# Altium PCB 数字电路时钟.PcbDoc
Units mil, origin at the board's own origin, x right, y up, seen from the top; angles counter-clockwise.
Board outline 4060 x 3660 mil, 2 copper layers (Top Layer, Bottom Layer); 50 components, 110 nets, 472 pads, 60 vias.
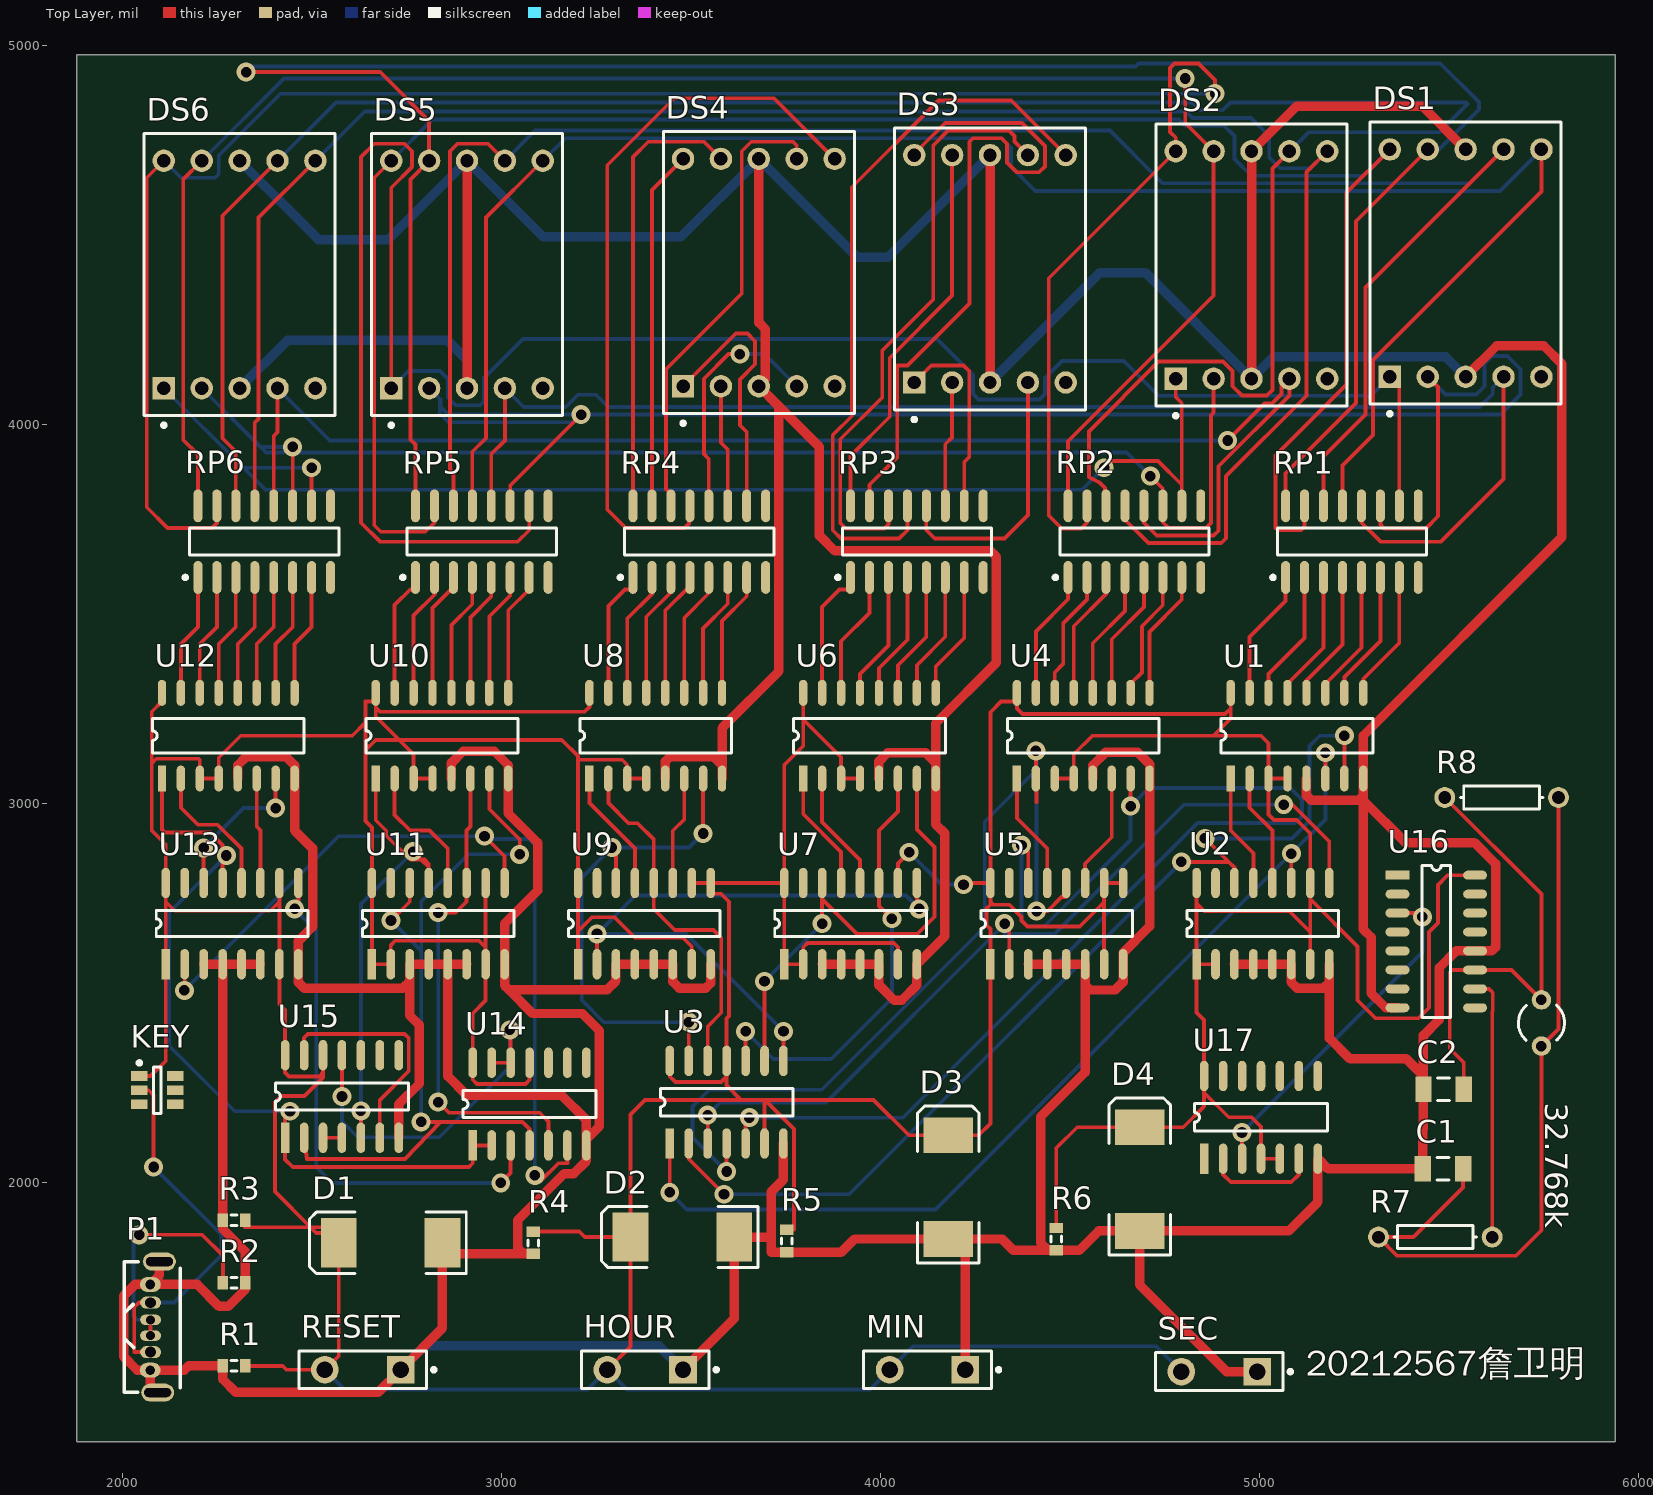
[diagram p0: Top Layer view]
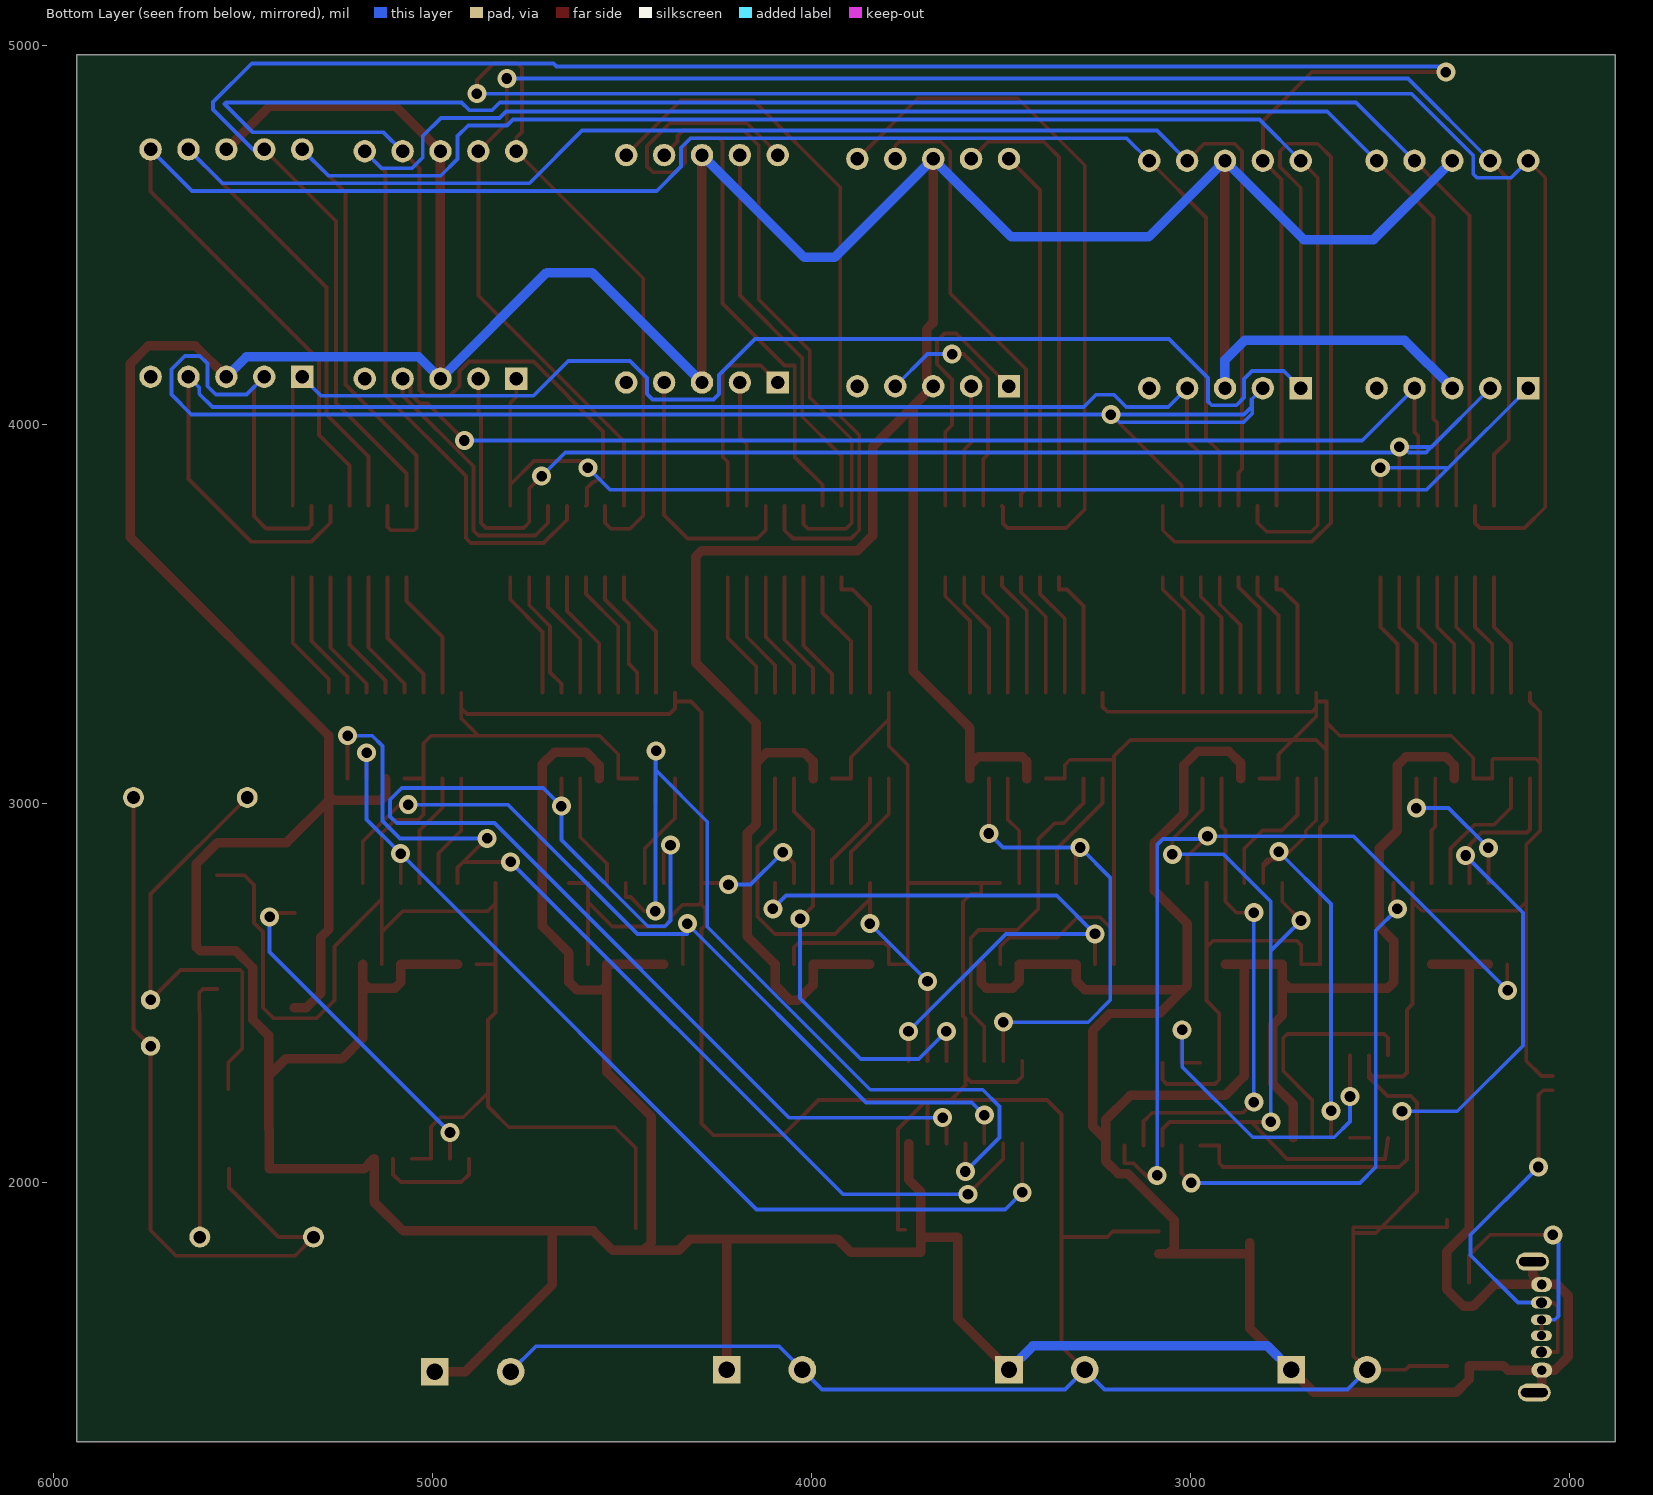
[diagram p1: Bottom Layer view, seen from below]

## Layer stack, top to bottom
Top Solder: solder mask 0.4, Solder Resist, Dk 3.5
Top Layer: signal copper 1.4
Dielectric 1: dielectric 12.6, FR-4, Dk 4.8
Bottom Layer: signal copper 1.4
Bottom Solder: solder mask 0.4, Solder Resist, Dk 3.5

## Board outline
1880,1315 1880,4975 5940,4975 5940,1315

## Design rules (kind name [scope] priority, off if disabled: settings)
Clearance [All] p1: gap=10 ignorepadtopadclearanceinfootprint=FALSE except(0: Arc-Hole Track-Hole SMDPad-Hole THPad-Hole Via-Hole Fill-Hole Poly-Hole Region-Hole Text-Hole)
MinimumSolderMaskSliver [All] p1: minsoldermaskwidth=2
PolygonConnect [All] p1: connectstyle=Relief reliefconductorwidth=10 reliefentries=4 polygonreliefangle="90 Angle" airgapwidth=10
RoutingVias [All] p1: holewidth=28 width=50 viastyle="Through Hole" minholewidth=28 minwidth=50 maxholewidth=28 maxwidth=50
SilkToSilkClearance [All] p1: silktosilkclearance=5
SilkToSolderMaskClearance [IsPad] p1: minsilkscreentomaskgap=0 clearancetoexposedcopper=TRUE
SolderMaskExpansion [All] p1: expansion=4 istentingtop=FALSE
Width GND [InNet('GND')] p1: maxlimit=35 minlimit=20 preferedwidth=25
Width [All] p2: maxlimit=10 minlimit=10 preferedwidth=10
27 further rules are at their usual default settings.

## Components (designator, comment, footprint, x,y, rotation, side; value= is the part's Value field where it differs from the comment)
32.768k "XTAL" R38 5745,2420 r180 top
C1 "Cap Semi" C1206 5485,2035 r0 top value=18p
C2 "Cap Semi" C1206 5486.85,2245 r0 top value=18p
D1 "Diode" SMC 2708.19,1840 r180 top
D2 "Diode" SMC 3478.41,1855 r180 top
D3 "Diode" SMC 4180,1986.81 r90 top
D4 "Diode" SMC 4685,2008.19 r90 top
DS1 "Dpy Blue-CC" H 5545,4425 r0 top
DS2 "Dpy Blue-CC" H 4980,4420 r0 top
DS3 "Dpy Blue-CC" H 4290,4410 r0 top
DS4 "Dpy Blue-CC" H 3680,4400 r0 top
DS5 "Dpy Blue-CC" H 2910,4395 r0 top
DS6 "Dpy Blue-CC" H 2310,4395 r0 top
HOUR "SW-PB" SPST-2 3380,1505 r180 top
KEY "SW-DPDT" SOT23-6_N 2092.76,2242.6 r0 top
MIN "SW-PB" SPST-2 4125,1505 r180 top
P1 "type-c-6p" "type-c-6p - duplicate" 2098.38,1447.04 r90 top
R1 "Res3" J1-0603 2295,1515 r0 top value=1K
R2 "Res3" J1-0603 2295.47,1735 r180 top value=1K
R3 "Res3" J1-0603 2295,1900 r0 top value=1K
R4 "Res3" J1-0603 3085,1840 r90 top value=1K
R5 "Res3" J1-0603 3753.4,1845 r90 top value=1K
R6 "Res3" J1-0603 4465,1849.53 r90 top value=1K
R7 "Res1" AXIAL-0.3 5465,1855 r180 top value=130K
R8 "Res1" AXIAL-0.3 5640,3015 r180 top value=10M
RESET "SW-PB" SPST-2 2635,1505 r180 top
RP1 "Res Pack3" SO-16_N 5245,3690 r90 top value=510
RP2 "Res Pack3" SO-16_N 4671,3690 r90 top value=510
RP3 "Res Pack3" SO-16_N 4097,3690 r90 top value=510
RP4 "Res Pack3" SO-16_N 3523,3690 r90 top value=510
RP5 "Res Pack3" SO-16_N 2949,3690 r90 top value=510
RP6 "Res Pack3" SO-16_N 2375,3690 r90 top value=510
SEC "SW-PB" SPST-2 4895,1500 r180 top
U1 "CD4511" CD4511BM/TR 4925,3065 r90 top
U2 "74LS161AD" 74LS161 4835,2575 r90 top
U3 "74LS00" 74LS00 3445,2101.97 r90 top
U4 "CD4511" CD4511BM/TR 4361,3065 r90 top
U5 "74LS161AD" 74LS161 4291,2575 r90 top
U6 "CD4511" CD4511BM/TR 3797,3065 r90 top
U7 "74LS161AD" 74LS161 3747,2575 r90 top
U8 "CD4511" CD4511BM/TR 3233,3065 r90 top
U9 "74LS161AD" 74LS161 3203,2575 r90 top
U10 "CD4511" CD4511BM/TR 2669,3065 r90 top
U11 "74LS161AD" 74LS161 2659,2575 r90 top
U12 "CD4511" CD4511BM/TR 2105,3065 r90 top
U13 "74LS161AD" 74LS161 2115,2575 r90 top
U14 "74LS00" 74LS00 2925,2096.97 r90 top
U15 "74LS08" 74LS08 2430,2116.97 r90 top
U16 "CD4060BM/TR" CD4060BM/TR 5365.28,2810 r0 top
U17 "74LS74" 74LS74 4855,2061.97 r90 top

## Footprints (in the part's own frame and the unit in brackets; to place one, negate y for a bottom-side part, rotate by r counter-clockwise, add the part's x,y. Pads: shape width x height; smd on the part's side, far side on the other; paste and mask are expansions set on the pad)
74LS00 [mil]
  rect 80.24x22.6 smd: 1(0,0)
  oval 80.24x22.6 smd: 2(0,-50) 3(0,-100) 4(0,-150) 5(0,-200) 6(0,-250) 7(0,-300) 8(218.03,-300) 9(218.03,-250) 10(218.03,-200) 11(218.03,-150) 12(218.03,-100) 13(218.03,-50) 14(218.03,0)
  silkscreen extent 73,-325 145,25
74LS08 [mil]
  rect 80.24x22.6 smd: 1(0,0)
  oval 80.24x22.6 smd: 2(0,-50) 3(0,-100) 4(0,-150) 5(0,-200) 6(0,-250) 7(0,-300) 8(218.03,-300) 9(218.03,-250) 10(218.03,-200) 11(218.03,-150) 12(218.03,-100) 13(218.03,-50) 14(218.03,0)
  silkscreen extent 73,-325 145,25
74LS74 [mil]
  rect 80.24x22.6 smd: 1(0,0)
  oval 80.24x22.6 smd: 2(0,-50) 3(0,-100) 4(0,-150) 5(0,-200) 6(0,-250) 7(0,-300) 8(218.03,-300) 9(218.03,-250) 10(218.03,-200) 11(218.03,-150) 12(218.03,-100) 13(218.03,-50) 14(218.03,0)
  silkscreen extent 73,-325 145,25
74LS161 [mil]
  rect 80.24x22.6 smd: 1(0,0)
  oval 80.24x22.6 smd: 2(0,-50) 3(0,-100) 4(0,-150) 5(0,-200) 6(0,-250) 7(0,-300) 8(0,-350) 9(214.33,-350) 10(214.33,-300) 11(214.33,-250) 12(214.33,-200) 13(214.33,-150) 14(214.33,-100) 15(214.33,-50) 16(214.33,0)
  silkscreen extent 73,-375 141,25
AXIAL-0.3 [mm] "Axial Device, Thru-Hole; 2 Leads; 0.3 in Pin Spacing"
  round 1.4 hole 0.85: 1(-3.81,0) 2(3.81,0)
  silkscreen extent -2.77,-0.76 2.77,0.76
C1206 [mm] "Chip Capacitor, Body 3.2x1.6mm, IPC High Density"
  rect 1.1x1.7 smd: 1(-1.35,0) 2(1.35,0)
  silkscreen extent -0.4,-0.75 0.4,0.75, body extent -1.7,-0.9 1.7,0.9, height 1.3
CD4060BM/TR [mm]
  rect 1.6x0.6 smd: 1(0,0)
  oval 1.6x0.6 smd: 2(0,-1.27) 3(0,-2.54) 4(0,-3.81) 5(0,-5.08) 6(0,-6.35) 7(0,-7.62) 8(0,-8.89) 9(5.2,-8.89) 10(5.2,-7.62) 11(5.2,-6.35) 12(5.2,-5.08) 13(5.2,-3.81) 14(5.2,-2.54) 15(5.2,-1.27) 16(5.2,0)
  silkscreen extent 1.64,-9.53 3.57,0.64
CD4511BM/TR [mm]
  rect 1.745x0.56 smd: 1(0,0)
  oval 1.745x0.56 smd: 2(0,-1.27) 3(0,-2.54) 4(0,-3.81) 5(0,-5.08) 6(0,-6.35) 7(0,-7.62) 8(0,-8.89) 9(5.745,-8.89) 10(5.745,-7.62) 11(5.745,-6.35) 12(5.745,-5.08) 13(5.745,-3.81) 14(5.745,-2.54) 15(5.745,-1.27) 16(5.745,0)
  silkscreen extent 1.71,-9.53 4.04,0.64
H [mm] "LED, 7-Segment Display, 14.2 mm, RHD; 10 Leads; Row Space 15.24 mm; Pitch 2.54 mm"
  rect 1.5x1.5 hole 0.9: 1(-5.08,-7.62)
  round 1.5 hole 0.9: 2(-2.54,-7.62) 3(0,-7.62) 4(2.54,-7.62) 5(5.08,-7.62) 6(5.08,7.62) 7(2.54,7.62) 8(0,7.62) 9(-2.54,7.62) 10(-5.08,7.62)
  silkscreen extent -6.4,-10.22 6.4,9.45, body extent -6.4,-9.45 6.4,9.45, height 8.25
J1-0603 [mm] "Chip Resistor, Body 1.6x0.8mm, IPC High Density"
  rect 0.7x0.9 smd: 1(-0.75,0) 2(0.75,0)
  silkscreen extent -0.2,-0.35 0.2,0.35, body extent -0.85,-0.48 0.85,0.48, height 0.9
R38 [mm] "Crystal, Thru-Hole; 2 Leads; Body 3.1 x 8.2 mm (Dia.xH)"
  round 1.3 hole 0.7: 1(0,1.55) 2(0,-1.55)
  silkscreen extent -1.55,-1.19 1.55,1.17
SMC [mm] "DO-214-AB/SMC; 2 C-Bend Leads; Body 7.9 x 5.9 mm, inc. leads (LxW)"
  rect 2.4x3.3 smd: 1(-3.475,0) 2(3.475,0)
  silkscreen extent -5.07,-2.05 5.43,2.06
SO-16_N [mm] "SOIC, 16-Leads, Body 9.9x3.9mm, Pitch 1.27mm, IPC Medium Density"
  oval 2.2x0.6 smd: 1(-2.4,4.445) 2(-2.4,3.175) 3(-2.4,1.905) 4(-2.4,0.635) 5(-2.4,-0.635) 6(-2.4,-1.905) 7(-2.4,-3.175) 8(-2.4,-4.445) 9(2.4,-4.445) 10(2.4,-3.175) 11(2.4,-1.905) 12(2.4,-0.635) 13(2.4,0.635) 14(2.4,1.905) 15(2.4,3.175) 16(2.4,4.445)
  silkscreen extent -2.52,-5 0.9,5.42, body extent -2,-5 2,5, height 1.75
SOT23-6_N [mm] "SOT23, 6-Leads, Body 2.9x1.6mm, Pitch 0.95mm, Lead Span 2.7mm, IPC Medium Density"
  rect 1.1x0.65 smd: 1(-1.2,0.95) 2(-1.2,0) 3(-1.2,-0.95) 4(1.2,-0.95) 5(1.2,0) 6(1.2,0.95)
  silkscreen extent -1.32,-1.55 0.25,1.95, body extent -0.9,-1.55 0.9,1.55, height 1.45
SPST-2 [mm] "Switch; 2 Leads"
  rect 1.85x1.85 hole 1.1: 1(-2.54,0)
  round 1.85 hole 1.1: 2(2.54,0)
  silkscreen extent -4.89,-1.27 4.28,1.27
"type-c-6p - duplicate" [mm]
  oval 1.2x2.2 hole 1.8 slot 0.6 at 0 deg: 1(-0.056,0.118) 2(8.719,0.001)
  oval 0.7x1.4 hole 0.6: A5(3.758,0.594) B5(4.818,0.594)
  oval 0.8x1.4 hole 0.72: A9(5.97,0.594) B9(2.655,0.594)
  oval 1x1.4 hole 0.65: A12(7.187,0.607) B12(1.442,0.62)
  silkscreen extent -0.03,-1.39 8.7,2.35

## Part data
32.768k: "Crystal Oscillator", LatestRevisionDate=17-Jul-2002, LatestRevisionNote="Re-released for DXP Platform.", PackageDescription="Crystal, Thru-Hole; 2 Leads; Body 3.1 x 8.2 mm (Dia.xH)", PackageReference=R38, Published=8-Jun-2000, Publisher="Altium Limited"
C1 C2: "Capacitor (Semiconductor SIM Model)", LatestRevisionDate=29-May-2009, LatestRevisionNote="IPC-7351 Footprint Added.", PackageDescription="Chip Capacitor", PackageReference=C1206, Published=8-Jun-2000, Publisher="Altium Limited"
D1 D2 D3 D4: "Default Diode", Code_JEDEC=DO-214-AB, LatestRevisionDate=17-Jul-2002, LatestRevisionNote="Re-released for DXP Platform.", PackageDescription="DO-214-AB/SMC; 2 C-Bend Leads; Body 7.9 x 5.9 mm, inc. leads (LxW)", PackageReference=SMC, PackageVersion=Sep-1996, Published=8-Jun-2000, Publisher="Altium Limited"
DS1 DS2 DS3 DS4 DS5 DS6: "14.2 mm General Purpose Blue 7-Segment Display: CC, RH DP, Gray Surface", Colour=Blue, ComponentLink1Description="Manufacturer Link", ComponentLink1URL=http://www.agilent.com/, DatasheetVersion=24-Sep-2002, LatestRevisionDate=17-Dec-2003, LatestRevisionNote="Schematic revised, PCB Footprint replaced.", MinimumIntensity="2020 ucd", Note="IF = 10 mA", PackageDescription="LED, 7-Segment Display, 14.2 mm, RHD; 10 Leads; Row Space 15.24 mm; Pitch 2.54 mm", PackageReference=H, PackageVersion=24-Sep-2002, Published=8-Jun-2000, Publisher="Altium Limited"
HOUR MIN RESET SEC: "Switch", LatestRevisionDate=17-Jul-2002, LatestRevisionNote="Re-released for DXP Platform.", PackageDescription="Switch; 2 Leads", PackageReference=SPST-2, Published=24-Mar-1999, Publisher="Altium Limited"
KEY: "Double-Pole, Double-Throw Switch", LatestRevisionDate=17-Jul-2002, LatestRevisionNote="Re-released for DXP Platform.", PackageDescription="Switch; 6 Leads", PackageReference=DPDT-6, Published=24-Mar-1999, Publisher="Altium Limited"
R1 R2 R3 R4 R5 R6 R7 R8: "Resistor", Published=8-Jun-2000, Publisher="Altium Limited"
  R1 R2 R3 R4 R5 R6: LatestRevisionDate=29-May-2009, LatestRevisionNote="IPC-7351 Footprint Added.", PackageDescription="Chip Resistor", PackageReference=J1-0603
  R7 R8: LatestRevisionDate=17-Jul-2002, LatestRevisionNote="Re-released for DXP Platform.", PackageDescription="Axial Device, Thru-Hole; 2 Leads; 0.3 in Pin Spacing", PackageReference=AXIAL-0.3
RP1 RP2 RP3 RP4 RP5 RP6: "Isolated Resistor Network", Code_IPC=SOIC127P600-16, Code_JEDEC=MS-012-AC, LatestRevisionDate=29-May-2009, LatestRevisionNote="IPC-7351 Footprint Added.", PackageDescription="16-Pin Small Outline Integrated Circuit 1.27 mm Pitch", PackageReference=SO-16, Published=24-Mar-1999, Publisher="Altium Limited"

## Via types
v1: diameter 50, hole 28, Top Layer to Bottom Layer, 60 vias

## Nets (pads, with @x,y where several pads share a name; then routed paths per layer and width w, separated by ;. In a path a pad name is that pad's centre, name@x,y a point inside that pad or via, vN(x,y) a via of type N, cw(c..) or ccw(c..) an arc to the next point about the centre after c; other vN are vias at no path point)
CLR: D1.2 D2.2 D3.2 D4.2 HOUR.2 KEY.1 MIN.2 R1.2 R3.2 R4.2 R5.2 R6.2 RESET.2 SEC.2 U1.3 U1.4 U1.16 U2.1 U2.2 U2.7 U2.10 U2.16 U3.6 U3.11 U3.14 U4.3 U4.4 U4.16 U5.1 U5.7 U5.9 U5.10 U5.16 U6.3 U6.4 U6.16 U7.1 U7.2 U7.7 U7.10 U7.16 U8.3 U8.4 U8.16 U9.1 U9.7 U9.9 U9.10 U9.16 U10.3 U10.4 U10.16 U11.1 U11.2 U11.7 U11.10 U11.16 U12.3 U12.4 U12.16 U13.1 U13.7 U13.10 U13.16 U14.11 U14.14 U15.12 U15.14 U16.16 U17.4 U17.5 U17.14 | length 23312.6
  Top Layer w10: KEY.1 2075,2280 2115,2320 U13.1 2115,2740 ; U12.16 2105,3268 2078,3241 2078,3105 ; R1.2 2424,1515 2434,1505 RESET.2 2571.38,1541.38 D1.2 D1.2@2571.38,1866 ; R3.2 2324.53,1881 2497,1881 ; U13.10 2415,2740 ; U15.12 2530,2289 ; U10.16 U10.16@2669,3268 ; U10.4 U10.3 2769,3129 2731,3167 ; U11.10 2959,2620 ; U14.11 3075,2270 3064,2259 2936,2259 2925,2270 U14.14 2925,2445 2959,2479 U11.7 2959,2620 ; R4.2 3206,1869.53 3220.53,1855 D2.2 ; U9.1 3203,2662 ; U8.16 3233,3254 3220,3241 2680,3241 2669,3252 ; HOUR.2 3341.6,1566.6 D2.2 ; U8.4 U8.3 3333,3101 3319.65,3114.35 3206,3114.35 3203,3111.35 ; U3.14 3445,2279 3460,2264 3580,2264 3595,2279 ; U9.7 3503,2622 3480,2645 3353,2645 3299,2699 3240,2699 3203,2662 ; U9.10 U9.9 ; U3.6 3695,2217.09 ; R5.2 3773,1874.53 3773,2140 3695.91,2217.09 ; U6.16 3797,3221 ; U6.4 U6.3 3897,3121 3797,3221 ; U7.7 4047,2620 4036,2631 3808,2631 3797,2620 U7.2 U7.1 U7.16 ; U7.10 4047,2841 v1(4076.5,2870.5) ; v1(4220,2785) 4224.33,2789.33 U5.16 ; U4.16 U4.16@4361,3268 ; U4.3 U4.4 4511,3129 4560,3178 4880,3178 ; R6.2 4465,2090 4520,2145 D4.2 4800,2145 4855,2200 4855,2236 ; U5.7 4591,2738.63 ; U5.9 U5.10 4591,2738.63 ; U2.16 4835,2736 ; U2.2 U2.1 ; U1.16 4925,3250 ; U17.5 U17.4 5005,2146 4980,2171 4920,2171 4855,2236 ; U1.4 U1.3 ; U2.7 5135,2660 ; U16.16 5498,2810 5471.77,2783.77 5471.77,2683.77 5448,2660 5448,2460 5420.5,2432.5 5307.5,2432.5 5260,2480 5260,2622 5135,2747 ; 2078,3105 2078,2928 2115,2891 U13.16 2115,2740 ; 2078,3105 2090,3117 2202,3117 2205,3114 U12.3 U12.4 2255,3120 2313,3178 2607,3178 2642,3213 ; 2115,2740 2139,2716 2391,2716 2415,2740 ; 2415,2740 U13.7 2415,2470 2430,2455 U15.14 2430,2289 2440,2279 2520,2279 2530,2289 ; 2497,1881 2512,1866 D1.2@2571.38,1866 ; 2497,1881 2403,1975 2403,2210.19 2420,2227.19 2481.19,2227.19 2530,2276 2530,2289 ; 2497,1881 2571.38,1881 D1.2@2571.38,1866 ; 2642,3140 2642,3213 ; 2642,3140 2642,2953 2659,2936 U11.16 U11.1 U11.2 2709,2626 2720,2637 2942,2637 2959,2620 ; 2642,3140 2669,3167 2731,3167 ; 2642,3213 2642,3268 U10.16@2669,3268 ; 2669,3252 2669,3229 2731,3167 ; 2669,3252 U10.16@2669,3268 ; 2731,3167 3160,3167 3203,3124 3203,3111.35 ; 3203,2662 U9.16 3203,3111.35 ; D2.2 3341.6,2178.68 3380,2217.09 3633.14,2217.09 ; U9.9 3553,2761 3580,2761 3601,2740 3601,2438 3595,2432 U3.11 3595,2279 ; U9.9 U7.16 ; 3595,2279 3595,2256 3633.14,2217.09 ; 3633.14,2217.09 3695,2217.09 ; 3695,2217.09 3695.91,2217.09 ; 3695.91,2217.09 3982.91,2217.09 4076.38,2123.62 D3.2 4260,2123.62 4291,2154.62 U5.1 4291,2668 4281,2678 4281,2722 4291,2732 4291,2740 ; U7.16 3747,3101 3797,3151 3797,3221 ; 4291,2740 U5.16 ; 4291,2740 4299,2732 4341,2732 4373,2700 4373,2690 4388.79,2674.21 4526.58,2674.21 4591,2738.63 ; U5.16 4291,3240 4319,3268 U4.16@4361,3268 ; U4.16@4361,3268 4361,3250 4376,3235 4910,3235 4925,3250 ; U2.1 4835,2736 ; U2.1 4835,2448 4855,2428 U17.14 4855,2236 ; 4835,2736 4856,2715 5080,2715 5135,2660 ; 4880,3178 5005,3178 5025,3158 U1.3 ; 4880,3178 4925,3223 4925,3250 ; U1.3 5025,2970 5039.35,2955.65 5099.35,2955.65 5135,2920 U2.10 5135,2747 ; 5135,2660 5135,2747
  Bottom Layer w10: RESET.2 2587,1453 3228,1453 HOUR.2 3332,1453 3973,1453 MIN.2 4087,1567 4728,1567 SEC.2 ; v1(4076.5,2870.5) 4162,2785 v1(4220,2785)
DS11: DS1.7 DS5.7 RP1.14 RP5.14 | length 5011.1
  Top Layer w10: RP5.14 2874,3872 2865,3881 2865,4720 2885,4740 2965,4740 DS5.7 ; RP1.14 5170,3915 5280.47,4025.47 5280.47,4360.47 DS1.7
  Bottom Layer w10: DS5.7 3089.53,4774.53 4606.47,4774.53 4745.53,4635.47 5555.47,4635.47 DS1.7
DS12: DS1.6 DS5.6 RP1.13 RP5.13 | length 4937.2
  Top Layer w10: RP5.13 2924,3927 2960,3963 2960,4545 DS5.6 ; RP1.13 5220,3891 5300.47,3971.47 5300.47,4169.53 5745,4614.06 DS1.6
  Bottom Layer w10: DS5.6 3169.53,4754.53 4320,4754.53 4345,4729.53 4345,4680 4409.53,4615.47 5635.47,4615.47 DS1.6
DS13: DS1.4 DS5.4 RP1.12 RP5.12 | length 3828.5
  Top Layer w10: RP5.12 2974,3921 3010,3957 DS5.4 ; RP1.12 5270,3740 5320,3690 5480,3690 5645,3855 DS1.4
  Bottom Layer w10: DS5.4 3059.53,4045.47 3170.74,4045.47 3202.68,4077.41 3250.74,4077.41 3282.68,4045.47 5581.86,4045.47 5616.39,4080 5616.39,4096.39 DS1.4
DS14: DS1.2 DS5.2 RP1.11 RP5.11 | length 4711.7
  Top Layer w10: RP5.11 3024,3838 v1(3211,4025) ; RP1.11 5320,3735 5330,3725 5440,3725 5472,3757 5472,4098 DS1.2
  Bottom Layer w10: DS5.2 2837.91,4067.09 ; v1(3211,4025) 3207.63,4025 3187.63,4005 2860.91,4005 2837.91,4028 2837.91,4045 2837.91,4067.09 ; DS1.2 5492,4078 5573,4078 5595,4100 5595,4160 5615,4180 5655,4180 5690,4145 5690,4078 5637.47,4025.47 3211,4025.47 2859.53,4025.47 2840,4045 2840,4065 2837.91,4067.09
DS15: DS1.1 DS5.1 RP1.10 RP5.10 | length 5712.3
  Top Layer w10: DS5.1 2710,4624 2765,4679 2765,4720 2745,4740 2665,4740 2630,4705 2630,3740 2680,3690 3044,3690 3074,3720 RP5.10 ; DS1.1 5370,4100 RP1.10
  Bottom Layer w10: DS5.1 2755,4140 2839,4140 2860,4119 2860,4070 2880,4050 2945,4050 2955,4060 2955,4122 3058,4225 4150,4225 4245,4130 4245,4080 4259.53,4065.47 4420.47,4065.47 4435,4080 4435,4122 4480,4167 4643,4167 4735,4075 5295,4075 DS1.1
DS16: DS1.9 DS5.9 RP1.16 RP5.16 | length 6176.7
  Top Layer w10: v1(2327,4929) 2681,4929 2810,4800 DS5.9 2761,4646 2761,3959 2774,3946 RP5.16 ; RP1.16 5070,3869.92 5255.55,4055.47 5255.55,4535.55 DS1.9
  Bottom Layer w10: v1(2327,4929) 2342,4944 4674,4944 4682,4952 5478,4952 5580,4850 5580,4830 5475,4725 DS1.9
DS17: DS1.10 DS5.10 RP1.15 RP5.15 | length 5269.4
  Top Layer w10: DS5.10 2665,4650 2665,3733.28 2682.28,3716 2800,3716 2824,3740 RP5.15 ; RP1.15 5120,3729 5111,3720 5049,3720 5043,3726 5043,3917 5231,4105 5231,4611 DS1.10
  Bottom Layer w10: DS5.10 2819,4804 4788.47,4804 4804.28,4788.18 4906.82,4788.18 4935,4760 4935,4700 4979.53,4655.47 5275.47,4655.47 DS1.10
DS21: DS2.7 DS6.7 RP2.14 RP6.14 | length 6225.5
  Top Layer w10: RP6.14 2300,3928 2265,3963 2265,4550 DS6.7 ; RP2.14 4593.55,3786.94 4593.55,3831.45 4580.15,3844.85 4579,3846 4577.55,3846.73 4551,3860 4551,3981 4735,4165 4905,4165 4930,4140 4930,4100 4954.53,4075.47 5020,4075.47 5035,4090.47 5035,4675 DS2.7
  Bottom Layer w10: DS6.7 2564,4849 4823.47,4849 4844.28,4828.18 4903.47,4828.18 4924.28,4849 5546,4849 5550,4845 5475,4770 5130,4770 DS2.7
DS22: DS2.6 DS6.6 RP2.13 RP6.13 | length 5280
  Top Layer w10: RP6.13 2350,4004 2360,4014 2360,4545 DS6.6 ; RP2.13 4646,3748 4707.82,3686.18 4900,3686.18 4912.81,3698.99 4912.81,3862.81 5125,4075 5125,4665 DS2.6
  Bottom Layer w10: DS6.6 2640,4825 4807.47,4825 4824.28,4808.18 4978.82,4808.18 5027,4760 5027,4703.47 5055,4675.47 5135.47,4675.47 DS2.6
DS23: DS2.4 DS6.4 RP2.12 RP6.12 | length 3859.9
  Top Layer w10: RP6.12 2400,3969.2 2410,3979.2 DS6.4 ; RP2.12 4696,3740 4729.82,3706.18 4880,3706.18 4892.81,3718.99 4892.81,3888.8 5080,4075.98 DS2.4 5059.49,4099.49 5059.49,4080 5034.96,4055.47 5015.47,4055.47 v1(4917,3957)
  Bottom Layer w10: DS6.4 2548,3957 v1(4917,3957)
DS24: DS2.2 DS6.2 RP2.11 RP6.11 | length 3501.5
  Top Layer w10: RP6.11 v1(2450,3940) ; v1(4713,3863) 4746,3830 RP2.11 4746,3741 4760.82,3726.18 4860,3726.18 4872.81,3738.99 4872.81,4022.81 4880,4030 DS2.2
  Bottom Layer w10: DS6.2 2365,3940 2370,3940 ; v1(2450,3940) 2370,3940 ; v1(4713,3863) 4651,3925 2450,3925 2442.65,3932.35 2431.52,3932.35 2424.18,3925 2380,3925 2370,3935 2370,3940
DS25: DS2.1 DS6.1 RP2.10 RP6.10 | length 3477.2
  Top Layer w10: RP6.10 v1(2500,3885) ; v1(4591,3885) 4609,3903 4733,3903 4796,3840 ; DS2.1 4780,4071.47 4796,4055.47 4796,3840 ; RP2.10 4796,3840
  Bottom Layer w10: DS6.1 2320,3885 ; v1(2500,3885) 2320,3885 ; v1(4591,3885) 4533,3827 2378,3827 2320,3885
DS26: DS2.9 DS6.9 RP2.16 RP6.16 | length 4949.5
  Top Layer w10: RP6.16 2200,3920 2161,3959 2161,4646 DS6.9 ; RP2.16 4496,3955 4880,4339 DS2.9 4805,4795 v1(4805,4912)
  Bottom Layer w10: DS6.9 2427,4912 v1(4805,4912)
DS27: DS2.10 DS6.10 RP2.15 RP6.15 | length 5775.4
  Top Layer w10: DS6.10 2065,4650 2065,3781 2120,3726 2237,3726 2250,3739 RP6.15 ; RP2.15 4546,3740 4530,3724 4480,3724 4445,3759 4445,4385 DS2.10 4780,4756 4765,4771 4765,4940 4777,4952 4840,4952 4884,4908 v1(4884,4872)
  Bottom Layer w10: DS6.10 2155,4650 2245,4650 2255,4660 2255,4709 2418,4872 v1(4884,4872)
DS31: DS3.7 RP3.14 | length 1585.8
  Top Layer w10: RP3.14 4022,3736 4010,3724 3910,3724 3895,3739 3895,3960 4005.47,4070.47 4005.47,4194.53 4140,4329.06 4140,4735 4179.53,4774.53 4340,4774.53 4354.53,4760 4354.53,4745.47 DS3.7
DS32: DS3.6 RP3.13 | length 1924.9
  Top Layer w10: RP3.13 4072,3720 4050,3698 3897,3698 3875,3720 3875,3971 3925,4021 3925,4625 4154,4854 4346,4854 DS3.6
DS33: DS3.4 RP3.12 | length 717.3
  Top Layer w10: RP3.12 4122,3720 4144,3698 4328,3698 4390,3760 DS3.4
DS34: DS3.2 RP3.11 | length 333
  Top Layer w10: RP3.11 4172,3947 4190,3965 DS3.2
DS35: DS3.1 RP3.10 | length 530.7
  Top Layer w10: DS3.1 4135,4155 4220,4155 4235,4140 4235,3913 4222,3900 RP3.10
DS36: DS3.9 RP3.16 | length 1036.5
  Top Layer w10: RP3.16 3922,3916 4025.47,4019.47 4025.47,4174.76 4190,4339.29 DS3.9
DS37: DS3.10 RP3.15 | length 1822.2
  Top Layer w10: RP3.15 3972,3840 4045.47,3913.47 4045.47,4154.53 4072.16,4154.53 4236,4318.37 4236,4745.06 4245.47,4754.53 4320,4754.53 4334.53,4740 4334.53,4690.47 4360,4665 4420,4665 4435,4680 4435,4734 4374,4795 4171.71,4795 4110,4733.29 4110,4730 DS3.10
DS41: DS4.7 RP4.14 | length 1218.2
  Top Layer w10: RP4.14 3448,3816 3435,3829 3435,4145 3635,4345 3635,4720 3660,4745 3770,4745 3780,4735 DS4.7
DS42: DS4.6 RP4.13 | length 1936.3
  Top Layer w10: RP4.13 3495.54,3782.03 3495.54,3737.54 3484,3726 3329,3726 3280,3775 3280,4683.24 3456.76,4860 3720,4860 DS4.6
DS43: DS4.4 RP4.12 | length 648
  Top Layer w10: RP4.12 3548,3908 3535,3921 3535,4120 3600,4185 v1(3630,4185)
  Bottom Layer w10: v1(3630,4185) 3695,4185 DS4.4
DS44: DS4.2 RP4.11 | length 323
  Top Layer w10: DS4.2 3580,3951 3598,3933 RP4.11
DS45: DS4.1 RP4.10 | length 714.4
  Top Layer w10: DS4.1 3619,4239 3650,4239 3670,4219 3670,4158 3630,4118 3630,3997 3648,3979 RP4.10
DS46: DS4.9 RP4.16 | length 1187.7
  Top Layer w10: RP4.16 3348,4705 3388,4745 3535,4745 DS4.9
DS47: DS4.10 RP4.15 | length 949.5
  Top Layer w10: RP4.15 3398,4618 DS4.10
GND: C1.1 C2.1 D1.1 D2.1 D3.1 D4.1 DS1.3 DS1.8 DS2.3 DS2.8 DS3.3 DS3.8 DS4.3 DS4.8 DS5.3 DS5.8 DS6.3 DS6.8 HOUR.1 MIN.1 P1.1 P1.2 P1.A12 P1.B12 R1.1 R2.1 R3.1 R4.1 R5.1 R6.1 RESET.1 SEC.1 U1.5 U1.8 U2.3 U2.4 U2.5 U2.6 U2.8 U3.7 U4.5 U4.8 U5.3 U5.4 U5.5 U5.6 U5.8 U6.5 U6.8 U7.3 U7.4 U7.5 U7.6 U7.8 U8.5 U8.8 U9.3 U9.4 U9.5 U9.6 U9.8 U10.5 U10.8 U11.3 U11.4 U11.5 U11.6 U11.8 U12.5 U12.8 U13.3 U13.4 U13.5 U13.6 U13.8 U14.7 U15.7 U16.8 U16.12 U17.7 | length 31074.9
  Top Layer w25: P1.1 2073.97,1464.59 P1.B12 ; P1.2 2098.35,1753.87 P1.A12 ; U13.3 U13.4 ; U12.5 2305,3100 2327,3122 2433,3122 2455,3100 U12.8 2455,2928 2502.5,2880.5 2502.5,2674 2465,2636.5 U13.8 2465,2527 2480,2512 2741,2512 2759,2530 ; U13.6 U13.5 U13.4 ; U15.7 2730,2206 2783.8,2259.8 2783.8,2415 2759,2439.8 2759,2530 ; D1.1 D1.1@2845,1810.47 ; U10.5 2869,3106 2900,3137 2982,3137 3019,3100 U10.8 3019,2973 3096.5,2895.5 3096.5,2769.5 3009,2682 U11.8 3009,2519 3020,2508 ; U11.6 U11.5 ; DS5.3 DS5.8 ; R4.1 3060,1810.47 ; U8.5 3433,3110 3445,3122 3561,3122 3583,3100 ; HOUR.1 3615.22,1640.22 D2.1 3713,1855 ; U9.8 3553,2525 3540,2512 3470,2512 3453,2529 U9.6 U9.5 U9.4 U9.3 3303,2531 3280,2508 3020,2508 ; U8.8 3583,3100 ; DS4.8 3680,4267.9 3697.5,4250.4 3697.5,4117.5 DS4.3 3733,4047 ; U3.7 3745,2007 3713,1975 3713,1855 ; U7.3 U7.4 U7.5 U7.6 3997,2520 4037,2480 4057,2480 4097,2520 U7.8 4171,2649 4171,2920 4147,2944 U6.8 4147,3106 ; U6.5 3997,3110 4020,3133 4120,3133 4147,3106 ; MIN.1 D3.1@4225,1850 ; DS3.3 DS3.8 ; U5.3 U5.4 U5.5 U5.6 4541,2520 ; U4.5 4561,3100 4595,3134 4680,3134 4711,3103 U4.8 4711,2675 4641,2605 U5.8 4641,2528 4620,2507 4554,2507 4541,2520 ; U2.3 U2.4 U2.5 U2.6 5085,2527 5100,2512 5170,2512 5185,2527 ; DS2.3 DS2.8 5099,4839 5431,4839 DS1.8 ; SEC.1 4914,1500 4685,1729 D4.1 ; U1.5 5125,3020 5137,3008 5263,3008 5275,3020 ; U2.8 5185,2527 ; U16.8 5334,2460 5296,2498 5296,2646 5275,2667 5275,3007 ; DS1.3 5627,4207 5751,4207 5798,4160 5798,3701 5275,3178 U1.8 5275,3020 ; P1.B12 2040,1503.8 2004,1539.8 2004,1700 2034,1730 P1.A12 ; P1.B12 2164,1503.8 2175.2,1515 R1.1 2265.47,1480 2299.47,1446 2676,1446 RESET.1 2845,1615 D1.1@2845,1810.47 ; P1.A12 2198,1730 2256,1672 2280,1672 2325,1717 R2.1 2325,1817 2265.47,1876.53 R3.1 2265.47,1904 2265,1904.47 U13.4 ; 2759,2530 U11.3 U11.4 U11.5 ; D1.1@2845,1810.47 3060,1810.47 ; U11.5 2859,2280 2910,2229 3160,2229 3225,2164 U14.7@3225,2113 ; 3020,2508 3083,2445 3214,2445 3259,2400 3259,2147 U14.7@3225,2113 ; 3060,1810.47 3044,1826.47 3044,1900 3166.49,2022.49 3191.49,2022.49 3225,2056 U14.7 U14.7@3225,2113 ; 3583,3100 3583,3198 3733,3348 3733,4047 ; 3713,1855 3713,1815.47 R5.1 3898,1815.47 3932.53,1850 D3.1 D3.1@4225,1850 ; 3733,4047 3840,3940 3840,3706 3880,3666 4291,3666 4307,3650 4307,3371 4147,3211 4147,3106 ; D3.1@4225,1850 4322,1850 4352,1820 4444,1820 ; 4444,1820 R6.1 4525.62,1820 4577,1871.38 D4.1 ; 4444,1820 4424,1840 4424,2173 4541,2290 4541,2520 ; D4.1 5078.38,1871.38 5155,1948 U17.7 5181.97,2035 C1.1 5431.85,2139 5433.7,2140.85 C2.1 5433.7,2280 ; 5185,2527 5185,2380 5240,2325 5388.7,2325 5433.7,2280 ; 5275,3007 5275,3020 ; 5275,3007 5386,2896 5568,2896 5624,2840 5624,2620 5614,2610 U16.12 5520,2610 5475.5,2565.5 5475.5,2429 5433.7,2387.2 5433.7,2280
  Bottom Layer w25: DS6.3 2436,4221 2858.32,4221 2910,4169.32 DS5.3 ; DS6.8 2518,4487 2702,4487 DS5.8 3111,4494 3474,4494 DS4.8 3940,4440 4020,4440 DS3.8 ; RESET.1 2798,1568 3417,1568 HOUR.1 ; DS3.3 4580,4400 4700,4400 DS2.3 5038,4178 5492,4178 DS1.3
Net32.768k_1: 32.768k.1 C1.2 R7.2 R8.1 | length 1965
  Top Layer w10: C1.2 5538.15,1986.15 5407,1855 R7.2 5364,1806 5678,1806 5745,1873 32.768k.1 5790,2403.98 R8.1
Net32.768k_2: 32.768k.2 C2.2 R8.2 U16.11 | length 1241.1
  Top Layer w10: R8.2 5745,2760 32.768k.2 5666.02,2560 U16.11 5509,2560 5503,2554 5503,2353 5540,2316 C2.2
NetKEY_2: KEY.2 P1.A9 P1.B9 | length 988
  Top Layer w10: KEY.2 2070.4,2242.6 2083,2230 v1(2083,2040.08) ; P1.B9 2032,1551.58 2032,1670 2044.08,1682.08 P1.A9
  Bottom Layer w10: P1.A9 2137,1682.08 2262.08,1807.16 2262.08,1861 v1(2083,2040.08)
NetP1_A5: P1.A5 P1.B5 R2.2 | length 626.1
  Top Layer w10: v1(2045,1861) 2211,1861 2265.94,1806.06 R2.2 ; P1.A5 P1.B5
  Bottom Layer w10: v1(2045,1861) 2030,1846 2030,1646.74 2040,1636.74 P1.B5
NetR7_1: R7.1 U16.10 | length 696.3
  Top Layer w10: U16.10 5606.5,2510 5616.5,2500 5616.5,2451 5615,2449.5 R7.1
NetRP1_1: RP1.1 U1.15 | length 343.7
  Top Layer w10: U1.15 4975,3438 5070,3533 RP1.1
NetRP1_2: RP1.2 U1.14 | length 343.7
  Top Layer w10: U1.14 5025,3341 5120,3436 RP1.2
NetRP1_3: RP1.3 U1.13 | length 343.7
  Top Layer w10: U1.13 5075,3315 5170,3410 RP1.3
NetRP1_4: RP1.4 U1.12 | length 343.7
  Top Layer w10: U1.12 5125,3323.41 5220,3418.41 RP1.4
NetRP1_5: RP1.5 U1.11 | length 343.7
  Top Layer w10: U1.11 5175,3315 5270,3410 RP1.5
NetRP1_6: RP1.6 U1.10 | length 343.7
  Top Layer w10: U1.10 5225,3333 5320,3428 RP1.6
NetRP1_7: RP1.7 U1.9 | length 343.7
  Top Layer w10: U1.9 5275,3327.31 5370,3422.31 RP1.7
NetRP2_1: RP2.1 U4.15 | length 339.5
  Top Layer w10: U4.15 4411,3453 4496,3538 RP2.1
NetRP2_2: RP2.2 U4.14 | length 339.5
  Top Layer w10: U4.14 4461,3345 4483,3367 4483,3474 4546,3537 RP2.2
NetRP2_3: RP2.3 U4.13 | length 339.5
  Top Layer w10: U4.13 4511,3467 4596,3552 RP2.3
NetRP2_4: RP2.4 U4.12 | length 339.5
  Top Layer w10: U4.12 4561,3422 4646,3507 RP2.4
NetRP2_5: RP2.5 U4.11 | length 339.5
  Top Layer w10: U4.11 4611,3432.67 4696,3517.67 RP2.5
NetRP2_6: RP2.6 U4.10 | length 339.5
  Top Layer w10: U4.10 4661,3315 4691,3345 4691,3467 4746,3522 RP2.6
NetRP2_7: RP2.7 U4.9 | length 339.5
  Top Layer w10: U4.9 4711,3452 4796,3537 RP2.7
NetRP3_1: RP3.1 U6.15 | length 352.4
  Top Layer w10: U6.15 3847,3518 3893,3564 3922,3564 RP3.1
NetRP3_2: RP3.2 U6.14 | length 335.4
  Top Layer w10: U6.14 3897,3427 3972,3502 RP3.2
NetRP3_3: RP3.3 U6.13 | length 335.4
  Top Layer w10: U6.13 3947,3341 4022,3416 RP3.3
NetRP3_4: RP3.4 U6.12 | length 335.4
  Top Layer w10: U6.12 3997,3356 4072,3431 RP3.4
NetRP3_5: RP3.5 U6.11 | length 335.4
  Top Layer w10: U6.11 4047,3364 4122,3439 RP3.5
NetRP3_6: RP3.6 U6.10 | length 335.4
  Top Layer w10: U6.10 4097,3364 4172,3439 RP3.6
NetRP3_7: RP3.7 U6.9 | length 335.4
  Top Layer w10: U6.9 4147,3360.76 4222,3435.76 RP3.7
NetRP4_1: RP4.1 U8.15 | length 343.6
  Top Layer w10: U8.15 3283,3520 3327,3564 3348,3564 RP4.1
NetRP4_2: RP4.2 U8.14 | length 331.3
  Top Layer w10: U8.14 3333,3487 3398,3552 RP4.2
NetRP4_3: RP4.3 U8.13 | length 331.3
  Top Layer w10: U8.13 3383,3491.66 3448,3556.66 RP4.3
NetRP4_4: RP4.4 U8.12 | length 331.3
  Top Layer w10: U8.12 3433,3508 3498,3573 RP4.4
NetRP4_5: RP4.5 U8.11 | length 331.3
  Top Layer w10: U8.11 3483,3488.77 3548,3553.77 RP4.5
NetRP4_6: RP4.6 U8.10 | length 331.3
  Top Layer w10: U8.10 3533,3461 3598,3526 RP4.6
NetRP4_7: RP4.7 U8.9 | length 331.3
  Top Layer w10: U8.9 3583,3481 3648,3546 RP4.7
NetRP5_1: RP5.1 U10.15 | length 335.3
  Top Layer w10: U10.15 2719,3523 2760,3564 2774,3564 RP5.1
NetRP5_2: RP5.2 U10.14 | length 327.1
  Top Layer w10: U10.14 2769,3495 2824,3550 RP5.2
NetRP5_3: RP5.3 U10.13 | length 327.1
  Top Layer w10: U10.13 2819,3515 2874,3570 RP5.3
NetRP5_4: RP5.4 U10.12 | length 327.1
  Top Layer w10: U10.12 2869,3470 2924,3525 RP5.4
NetRP5_5: RP5.5 U10.11 | length 327.1
  Top Layer w10: U10.11 2919,3490 2974,3545 RP5.5
NetRP5_6: RP5.6 U10.10 | length 327.1
  Top Layer w10: U10.10 2969,3493 3024,3548 RP5.6
NetRP5_7: RP5.7 U10.9 | length 327.1
  Top Layer w10: U10.9 3019,3509 3074,3564 RP5.7
NetRP6_1: RP6.1 U12.15 | length 323
  Top Layer w10: U12.15 2155,3420 2200,3465 RP6.1
NetRP6_2: RP6.2 U12.14 | length 323
  Top Layer w10: U12.14 2205,3420 2250,3465 RP6.2
NetRP6_3: RP6.3 U12.13 | length 323
  Top Layer w10: U12.13 2255,3420 2300,3465 RP6.3
NetRP6_4: RP6.4 U12.12 | length 323
  Top Layer w10: U12.12 2305,3420 2350,3465 RP6.4
NetRP6_5: RP6.5 U12.11 | length 323
  Top Layer w10: U12.11 2355,3420 2400,3465 RP6.5
NetRP6_6: RP6.6 U12.10 | length 323
  Top Layer w10: U12.10 2405,3420 2450,3465 RP6.6
NetRP6_7: RP6.7 U12.9 | length 323
  Top Layer w10: U12.9 2455,3420 2500,3465 RP6.7
NetU1_1: U1.1 U2.13 | length 300.5
  Top Layer w10: U1.1 4925,2928 4985,2868 U2.13
NetU1_2: U1.2 U2.12 | length 300.5
  Top Layer w10: U1.2 4975,2988 5035,2928 U2.12
NetU4_1: U4.1 U5.13 | length 308.8
  Top Layer w10: U4.1 4361,2960 4441,2880 U5.13
NetU4_6: U4.6 U5.11 | length 304.7
  Top Layer w10: U5.11 4541,2840 4611,2910 U4.6
NetU6_1: U6.1 U7.13 | length 317.1
  Top Layer w10: U6.1 3797,2971 3897,2871 U7.13
NetU6_2: U6.2 U7.12 | length 317.1
  Top Layer w10: U6.2 3847,2950 3947,2850 U7.12
NetU8_1: U8.1 U9.13 | length 325.4
  Top Layer w10: U8.1 3233,3000 3353,2880 U9.13
NetU8_6: U8.6 U9.11 | length 288.1
  Top Layer w10: U9.11 3453,2927 3483,2957 U8.6
NetU10_2: U10.2 U11.12 | length 363.5
  Top Layer w10: U10.2 2719,2969 2760,2928 2811,2928 2859,2880 U11.12
NetU12_2: U12.2 U13.12 | length 372.4
  Top Layer w10: U12.2 2155,2988 2200,2943 2252,2943 2315,2880 U13.12
NetU12_6: U12.6 U13.11 | length 279.8
  Top Layer w10: U12.6 2355,2938 2365,2928 U13.11
NetU12_7: U12.7 U13.14 | length 404.3
  Top Layer w10: U13.14 v1(2215,2882.2) ; v1(2405,2987) U12.7
  Bottom Layer w10: v1(2215,2882.2) 2319.8,2987 v1(2405,2987)
NetU15_3: U15.3 U15.4 | length 50
  Top Layer w10: U15.3 U15.4
NetU15_6: U15.6 U15.13 | length 625.6
  Top Layer w10: U15.13 2480,2381 2490,2391 2745.3,2391 2756.3,2380 2756.3,2293.3 2680,2217 U15.6
NetU16_3: U16.3 U17.3 | length 905.1
  Top Layer w10: U17.3 v1(4955,2131) ; U16.3 5421,2710 v1(5431,2700)
  Bottom Layer w10: v1(4955,2131) 5431,2607 v1(5431,2700)
NetU17_2: U17.2 U17.6 | length 300.5
  Top Layer w10: U17.2 4905,2020 4925,2000 5085,2000 5105,2020 U17.6
OUT: U14.12 U14.13 U15.11 | length 947.4
  Top Layer w10: v1(2580,2226) U15.11 ; U14.13 U14.12 3025,2400 v1(3023,2402)
  Bottom Layer w10: v1(2580,2226) 2580,2160.2 2621.7,2118.5 2836.88,2118.5 3023,2304.62 v1(3023,2402)
U1A: U1.7 U2.14 U3.2 | length 2727.6
  Top Layer w10: U3.2 3495,2061 v1(3588,1968) ; v1(4795,2845) 4920,2845 ; v1(4857,2907) 4858,2907 4920,2845 ; U2.14 4935,2830 4920,2845 ; U1.7 v1(5225,3178)
  Bottom Layer w10: v1(3588,1968) 3918,1968 v1(4795,2845) ; v1(4857,2907) 5087,2907 5133.11,2953.11 5133.11,3151.11 5160,3178 v1(5225,3178)
U1D: U1.6 U2.11 U3.1 | length 2625.5
  Top Layer w10: v1(3445,1973) U3.1 ; U2.11 v1(5085,2867) ; U1.6 v1(5175,3133)
  Bottom Layer w10: v1(3445,1973) 3490,1928 4146,1928 v1(5085,2867) 5175,2957 v1(5175,3133)
U2LD: U2.9 U3.3 U5.2 | length 2354.4
  Top Layer w10: U3.3 v1(3545,2177) ; v1(4328.79,2682) 4341,2669.79 U5.2 ; v1(5065,2996) 5088,2996 5185,2899 U2.9
  Bottom Layer w10: v1(3545,2177) 3578.09,2210.09 3856.88,2210.09 v1(4328.79,2682) 4328.79,2655 4460.58,2655 4801.58,2996 v1(5065,2996)
U4A: U3.5 U4.7 U5.14 | length 3245.1
  Top Layer w10: U3.5 3645,2160 v1(3655,2170) ; v1(4373,2889) 4391,2871 U5.14 ; v1(4661,2992) U4.7
  Bottom Layer w10: v1(3655,2170) 4060,2170 4837.62,2947.62 5095.62,2947.62 5113.11,2965.11 5113.11,3008.89 5082,3040 4709,3040 v1(4661,2992) 4661,2903 4433,2675 4388,2675 4373,2690 v1(4373,2889)
U4C: U3.4 U4.2 U5.12 | length 2412.8
  Top Layer w10: v1(3595,2028) U3.4 ; v1(4411,3138) U4.2 4413,3065 4413,3003 ; v1(4413,2715) 4442,2715 4479,2752 4491,2752 U5.12
  Bottom Layer w10: v1(3595,2028) 3505,2118 3505,2200 3549,2244 3846,2244 4276,2674 4276,2951 4413,3088 ; v1(4411,3138) 4413,3136 4413,3088 ; v1(4413,2715) 4413,3088
U6A: U3.9 U6.7 U7.14 | length 1269.5
  Top Layer w10: U3.9 v1(3695,2530) ; v1(3847,2682) 3847,2747 ; U7.14 3847,2747 ; U6.7 4097,2930.75 4143.3,2884.45 4143.3,2700.1 4098.2,2655 3939,2655 3847,2747
  Bottom Layer w10: v1(3695,2530) v1(3847,2682)
U6D: U3.10 U6.6 U7.11 | length 1175.3
  Top Layer w10: U3.10 v1(3645,2398) ; v1(4031,2695) 3997,2729 U7.11 3997,2928 4047,2978 U6.6
  Bottom Layer w10: v1(3645,2398) 3718,2325 3871,2325 4031,2485 v1(4031,2695)
U7LD: U3.8 U7.9 U9.2 | length 1733.6
  Top Layer w10: U9.2 v1(3253,2655) ; U3.8 v1(3745,2398) ; U7.9 4097,2727 v1(4103,2721)
  Bottom Layer w10: v1(3745,2398) 3488,2655 v1(3253,2655) 3354,2756 4068,2756 v1(4103,2721)
U8A: U3.13 U8.7 U9.14 | length 1343.3
  Top Layer w10: v1(3292,2883) 3303,2872 U9.14 ; U3.13 v1(3495,2422) ; v1(3533,2920) U8.7
  Bottom Layer w10: v1(3495,2422) 3271,2422 3213,2480 3213,2804 v1(3292,2883) 3496,2883 v1(3533,2920)
U8C: U3.12 U8.2 U9.12 | length 957.2
  Top Layer w10: U8.2 3283,3000 3336,2947 3360,2947 3403,2904 U9.12 3403,2720 3458,2665 3560,2665 3581,2644 3581,2447 3545,2411 U3.12
U10A: U10.7 U11.14 U14.4 U15.2 | length 2145.1
  Top Layer w10: U15.2 2488,2061 2746.52,2061 2840,2159 ; v1(2709.5,2690.5) 2759,2740 U11.14 ; v1(2789,2159) 2840,2159 ; U10.7 2969,2984 3049,2904 v1(3049,2865) ; U14.4 3075,2140 3056,2159 2840,2159
  Bottom Layer w10: v1(2709.5,2690.5) 2789,2611 ; v1(2789,2159) 2789,2611 ; v1(3049,2865) 2914,2865 2789,2740 2789,2611
U10B: U10.1 U11.13 U15.5 | length 1226.1
  Top Layer w10: U15.5 v1(2630,2188) ; U10.1 2669,2955 2697,2927 2697,2914 2760,2851 2789,2851 ; v1(2768,2872) 2789,2851 ; U11.13 2809,2831 ; 2789,2851 2798,2851 2809,2840 2809,2831 ; 2789,2851 2809,2831
  Bottom Layer w10: v1(2630,2188) 2630,2734 v1(2768,2872)
U10D: U10.6 U11.11 U14.5 | length 1291.2
  Top Layer w10: v1(2834,2211.11) 2862.11,2183 3102,2183 3125,2160 U14.5 ; v1(2834,2711) 2880,2711 2909,2740 U11.11 2909,2928 2919,2938 U10.6
  Bottom Layer w10: v1(2834,2211.11) v1(2834,2711)
U11LD: U11.9 U13.2 U14.6 | length 2348.4
  Top Layer w10: v1(2164,2506) 2165,2507 U13.2 ; v1(2956.17,2912.83) 3009,2860 U11.9 ; v1(3089,2018) 3104,2003 3151,2050 3175,2050 U14.6
  Bottom Layer w10: v1(2164,2506) 2570.83,2912.83 v1(2956.17,2912.83) 2963.72,2905.28 3073.72,2905.28 3089,2890 v1(3089,2018)
U12B: U12.1 U13.13 U14.1 U14.2 U15.1 | length 2118
  Top Layer w10: U12.1 2105,2930.7 2113.5,2922.2 2232.8,2922.2 2265,2890 v1@2265,2852 ; U13.13 v1@2265,2852 ; v1(2275,2862) v1@2265,2852 ; v1(2443,2187) 2430,2174 U15.1 2430,2060 2450,2040 2915,2040 2925,2050 U14.1 U14.2
  Bottom Layer w10: v1(2275,2862) 2124,2711 2124,2360 2297,2187 v1(2443,2187)
U13LD: U13.9 U14.3 | length 1391.2
  Top Layer w10: v1(2455,2721) 2465,2731 U13.9 ; v1(2999,1998) 3025,2024 U14.3
  Bottom Layer w10: v1(2455,2721) 2512,2664 2512,2040 2554,1998 v1(2999,1998)
pads on no net: DS1.5 DS2.5 DS3.5 DS4.5 DS5.5 DS6.5 KEY.3 KEY.4 KEY.5 KEY.6 RP1.8 RP1.9 RP2.8 RP2.9 RP3.8 RP3.9 RP4.8 RP4.9 RP5.8 RP5.9 RP6.8 RP6.9 U2.15 U5.15 U7.15 U9.15 U11.15 U13.15 U14.8 U14.9 U14.10 U15.8 U15.9 U15.10 U16.1 U16.2 U16.4 U16.5 U16.6 U16.7 U16.9 U16.13 U16.14 U16.15 U17.1 U17.8 U17.9 U17.10 U17.11 U17.12 U17.13

## Polygon pours and split planes (outlines as drawn)
GND on Top Layer "Top Layer-No net" (hatched 90Degree grid 20 track 8, pour order 0): 6319,5140 6324,5135 10309,5135 10309,1530 10294,1515 6279,1515 6279,5135 6319,5175
GND on Bottom Layer "Top Layer-No net" (hatched 90Degree grid 20 track 8, pour order 1): 6495,9370 6500,9375 10525,9375 10525,5730 10505,5710 10480,5735 6475,5735 6475,9360 6480,9365

## Silkscreen, mask and mechanical layers (free items; w line width, h text height)
Top Overlay:
  text "20212567詹卫明" at 5122.97,1465.49 h118.11
Mechanical 1:
  the board outline again, w51.18
Mechanical 13:
  the board outline again, w19.68